# EAGLE board rgbsaber_control_v1.6_panel (EAGLE 5.10)
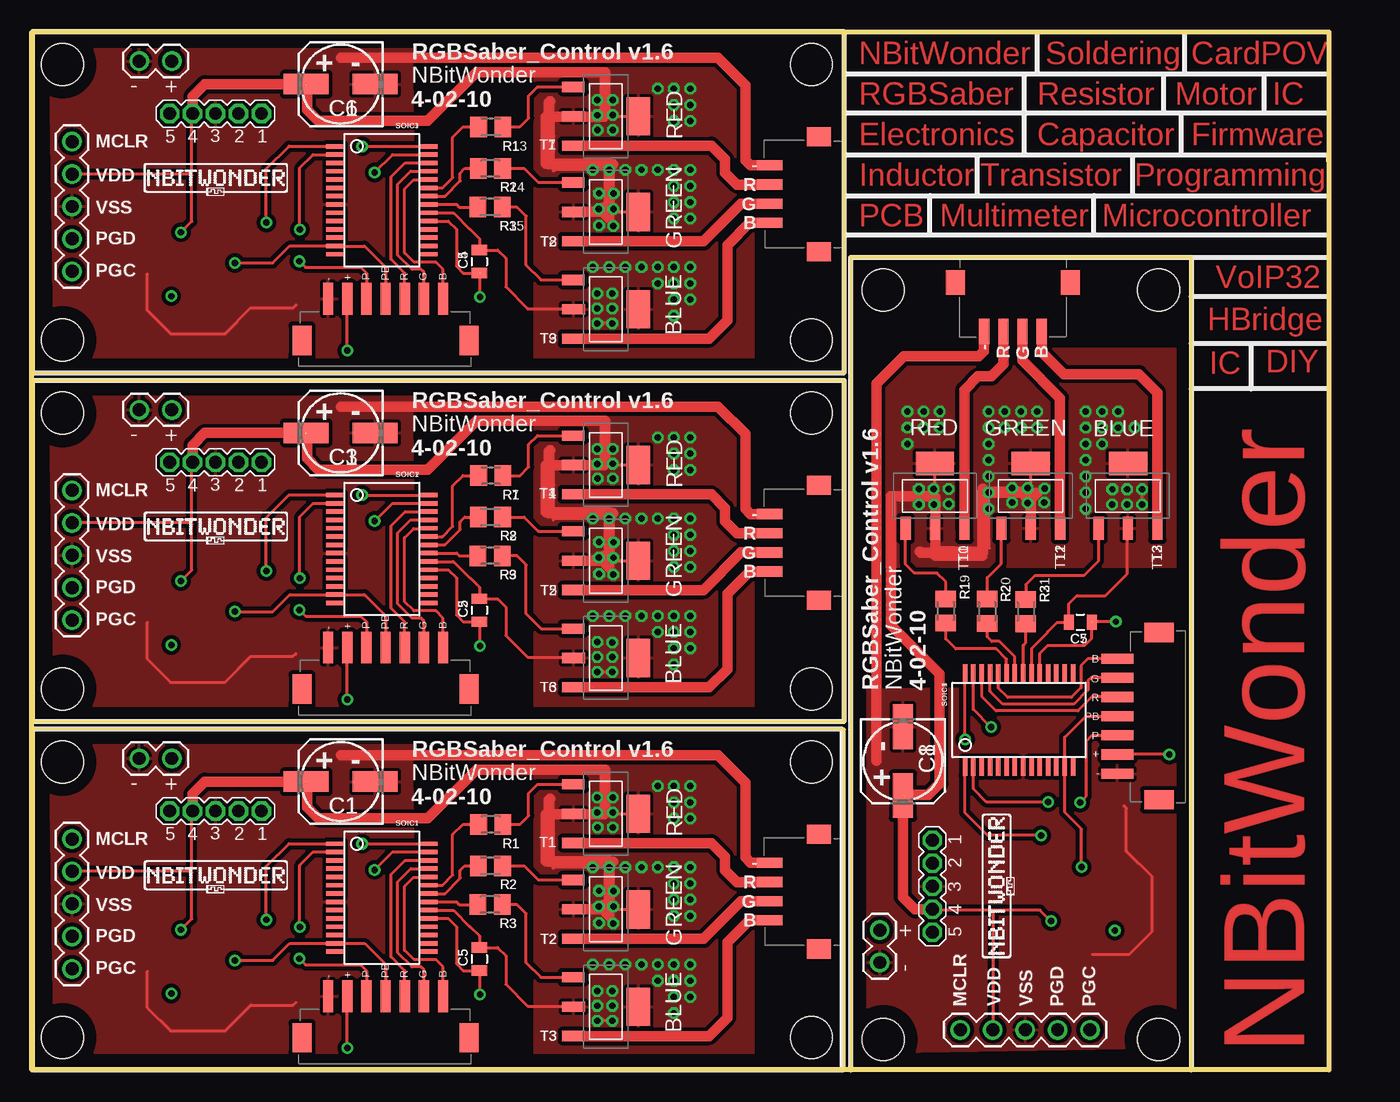
[diagram p0: board, top side]
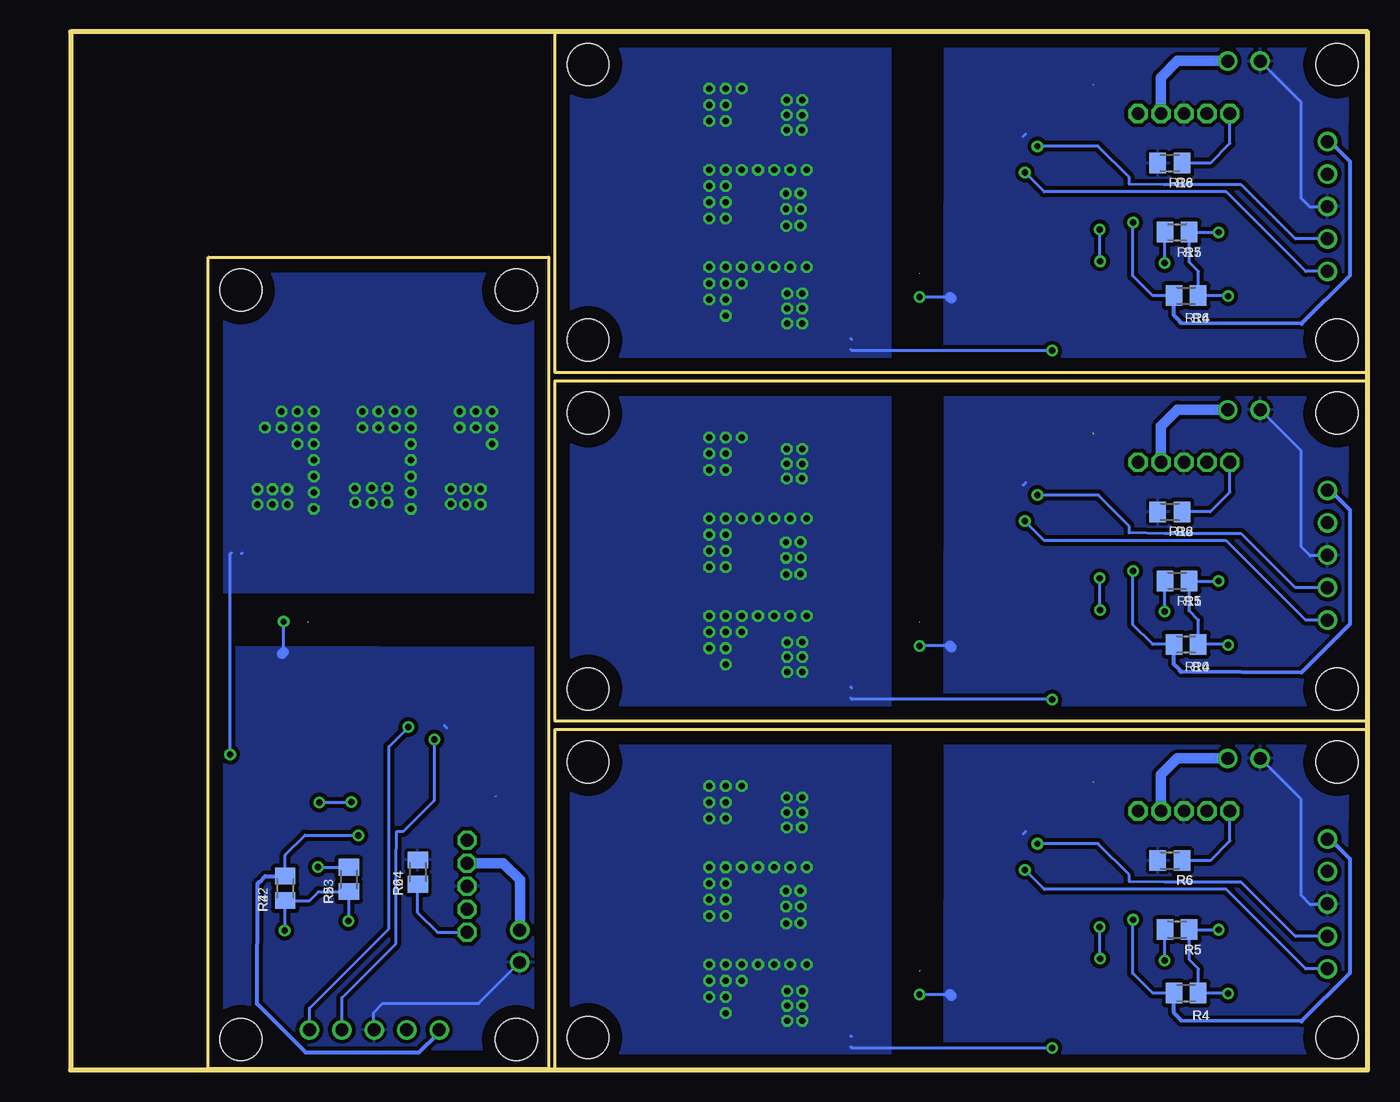
[diagram p1: board, bottom side, seen from below]

Size 101.6 x 81.28 mm. Coordinates in mm from the lower left corner, seen from the top.
Outline: 0,0 0,81.28 101.6,81.28 101.6,0 0,0
Outline: 0.1,0 63.65,0 63.65,26.66 0.1,26.67 0.1,0
Outline: 0.1,27.3 63.65,27.31 63.65,53.97 0.1,53.97 0.1,27.3
Outline: 0.1,54.61 63.65,54.61 63.65,81.27 0.1,81.28 0.1,54.61
Outline: 90.81,0.1 90.81,63.65 64.14,63.65 64.14,0.1 90.81,0.1
Copper layers (1*16): Top 0.035mm / dielectric 1.5mm / Bottom 0.035mm
Design rules "default": minimum track width 10mil, minimum drill 24mil, track to track 8mil, track to pad 8mil, pad to pad 8mil, via to via 8mil, smd to smd 8mil, copper to edge 40mil, drill to drill 8mil, minimum pad ring 10mil, minimum via ring 8mil, stop-mask expansion 4mil, vias tented up to drill 0mil, thermal gap 10mil

## Footprints (pad centres in the part's own frame; a part is rotated, then mirrored left to right if it is on the bottom)
JST_ZH_SM4_SE_4 = smd 0.8 x 2: 1 -2.25,-1.5; 2 -0.75,-1.5; 3 0.75,-1.5; 4 2.25,-1.5 | smd 1.5 x 1.9: NC0 -4.5,2.35; NC1 4.5,2.35
1X02 = drill 1.016 round: 1 0,0; 2 2.54,0
153CLV-0605 = smd 3.5 x 1.6: + 2.7,0; - -2.7,0
0805 = smd 0.8 x 1.2: 1 -0.9,0; 2 0.9,0
JST_ZH_SM4_TE_7 = smd 0.8 x 2.5: 1 -4.5,-3; 2 -3,-3; 3 -1.5,-3; 4 0,-3; 5 1.5,-3; 6 3,-3; 7 4.5,-3 | smd 1.5 x 2.3: NC0 -6.55,0.25; NC1 6.55,0.25
1X05 = drill 1.016 round: 1 0,0; 2 2.54,0; 3 5.08,0; 4 7.62,0; 5 10.16,0
M0805 = smd 1.3 x 1.6: 1 -0.95,0; 2 0.95,0
1X05_2MM = drill 1 octagon: 1 0,0; 2 1.8,0; 3 3.6,0; 4 5.4,0; 5 7.2,0
SSOP-28 = smd 0.348 x 1.397: 1 -4.225,-3.656; 2 -3.575,-3.656; 3 -2.925,-3.656; 4 -2.275,-3.656; 5 -1.625,-3.656; 6 -0.975,-3.656; 7 -0.325,-3.656; 8 0.325,-3.656; 9 0.975,-3.656; 10 1.625,-3.656; 11 2.275,-3.656; 12 2.925,-3.656; 13 3.575,-3.656; 14 4.225,-3.656; 15 4.225,3.656; 16 3.575,3.656; 17 2.925,3.656; 18 2.275,3.656; 19 1.625,3.656; 20 0.975,3.656; 21 0.325,3.656; 22 -0.325,3.656; 23 -0.975,3.656; 24 -1.625,3.656; 25 -2.275,3.656; 26 -2.925,3.656; 27 -3.575,3.656; 28 -4.225,3.656
SOT223 = smd 0.8 x 1.8: BASE -2.3,-2.55; COLL 0,-2.54; EMIT 2.3,-2.55 | smd 3 x 1.85: HEAT 0,2.54
STAND-OFF = hole 3.302: 0,0

## Placement (x,y rotation side)
_JST_SMD_RA1  1X04  [JST_ZH_SM4_SE_4]  59.31,13.97 270 top
_JST_SMD_RA2  1X04  [JST_ZH_SM4_SE_4]  59.31,41.28 270 top
_JST_SMD_RA3  1X04  [JST_ZH_SM4_SE_4]  59.31,68.58 270 top
_JST_SMD_RA4  1X04  [JST_ZH_SM4_SE_4]  76.83,59.31 0 top
BATT  [1X02]  8.41,24.39 0 top
BATT1  [1X02]  8.41,51.7 0 top
BATT2  [1X02]  8.41,79 0 top
BATT3  [1X02]  66.42,8.42 90 top
C1  [153CLV-0605]  24.18,22.58 180 top
C2  .01uF  [0805]  35.05,35.99 270 top
C3  [153CLV-0605]  24.18,49.89 180 top
C4  .01uF  [0805]  35.05,63.3 270 top
C5  .01uF  [0805]  35.05,8.69 270 top
C6  [153CLV-0605]  24.18,77.19 180 top
C7  .01uF  [0805]  82.12,35.05 0 top
C8  [153CLV-0605]  68.22,24.18 270 top
JST_SMD1  1X07_JST  [JST_ZH_SM4_TE_7]  27.7,2.77 180 top
JST_SMD2  1X07_JST  [JST_ZH_SM4_TE_7]  27.7,30.08 180 top
JST_SMD3  1X07_JST  [JST_ZH_SM4_TE_7]  27.7,57.38 180 top
JST_SMD4  1X07_JST  [JST_ZH_SM4_TE_7]  88.03,27.71 270 top
PRG  [1X05]  3.15,18.08 270 top
PRG1  [1X05]  3.15,45.39 270 top
PRG2  [1X05]  3.15,72.69 270 top
PRG3  [1X05]  72.72,3.15 0 top
R1  6.65K  [M0805]  35.94,19.23 0 top
R2  3.3K  [M0805]  35.91,15.98 0 top
R3  3.3K  [M0805]  35.89,12.96 0 top
R4  10K  [M0805]  14.22,6.02 180 bottom
R5  10K  [M0805]  14.92,11 180 bottom
R6  250  [M0805]  15.5,16.4 180 bottom
R7  6.65K  [M0805]  35.94,46.53 0 top
R8  3.3K  [M0805]  35.91,43.28 0 top
R9  3.3K  [M0805]  35.89,40.26 0 top
R10  10K  [M0805]  14.22,33.33 180 bottom
R11  10K  [M0805]  14.92,38.3 180 bottom
R12  250  [M0805]  15.5,43.7 180 bottom
R13  6.65K  [M0805]  35.94,73.84 0 top
R14  3.3K  [M0805]  35.91,70.59 0 top
R15  3.3K  [M0805]  35.89,67.56 0 top
R16  10K  [M0805]  14.22,60.63 180 bottom
R17  10K  [M0805]  14.92,65.61 180 bottom
R18  250  [M0805]  15.5,71.01 180 bottom
R19  6.65K  [M0805]  71.58,35.94 90 top
R20  3.3K  [M0805]  74.83,35.91 90 top
R21  3.3K  [M0805]  77.85,35.89 90 top
R22  10K  [M0805]  84.79,14.22 90 bottom
R23  10K  [M0805]  79.81,14.92 90 bottom
R24  250  [M0805]  74.41,15.5 90 bottom
REG  REG  [1X05_2MM]  10.78,20.28 0 top
REG1  REG  [1X05_2MM]  10.78,47.58 0 top
REG2  REG  [1X05_2MM]  10.78,74.89 0 top
REG3  REG  [1X05_2MM]  70.53,10.78 90 top
SOIC1  P18F2221SSOP  [SSOP-28]  27.41,13.49 270 top
SOIC2  P18F2221SSOP  [SSOP-28]  27.41,40.79 270 top
SOIC3  P18F2221SSOP  [SSOP-28]  27.41,68.1 270 top
SOIC4  P18F2221SSOP  [SSOP-28]  77.32,27.41 0 top
T1  FZTA14V1  [SOT223]  44.96,20.07 270 top
T2  FZTA14V1  [SOT223]  44.96,12.57 270 top
T3  FZTA14V1  [SOT223]  44.96,4.95 270 top
T4  FZTA14V1  [SOT223]  44.96,47.37 270 top
T5  FZTA14V1  [SOT223]  44.96,39.88 270 top
T6  FZTA14V1  [SOT223]  44.96,32.26 270 top
T7  FZTA14V1  [SOT223]  44.96,74.68 270 top
T8  FZTA14V1  [SOT223]  44.96,67.18 270 top
T9  FZTA14V1  [SOT223]  44.96,59.56 270 top
T10  FZTA14V1  [SOT223]  70.74,44.96 0 top
T11  FZTA14V1  [SOT223]  78.23,44.96 0 top
T12  FZTA14V1  [SOT223]  85.85,44.96 0 top
U$1  [STAND-OFF]  2.39,2.54 0 top
U$2  [STAND-OFF]  2.39,24.13 0 top
U$3  [STAND-OFF]  61.06,24.13 0 top
U$4  [STAND-OFF]  61.06,2.54 0 top
U$5  NBW_LOGOSMALL  [NBW_LOGO]  8.41,13.36 0 top
U$6  [STAND-OFF]  2.39,29.85 0 top
U$7  [STAND-OFF]  2.39,51.44 0 top
U$8  [STAND-OFF]  61.06,51.44 0 top
U$9  [STAND-OFF]  61.06,29.85 0 top
U$10  NBW_LOGOSMALL  [NBW_LOGO]  8.41,40.67 0 top
U$11  [STAND-OFF]  2.39,57.15 0 top
U$12  [STAND-OFF]  2.39,78.74 0 top
U$13  [STAND-OFF]  61.06,78.74 0 top
U$14  [STAND-OFF]  61.06,57.15 0 top
U$15  NBW_LOGOSMALL  [NBW_LOGO]  8.41,67.97 0 top
U$16  [STAND-OFF]  88.27,2.39 90 top
U$17  [STAND-OFF]  66.67,2.39 90 top
U$18  [STAND-OFF]  66.67,61.06 90 top
U$19  [STAND-OFF]  88.27,61.06 90 top
U$20  NBW_LOGOSMALL  [NBW_LOGO]  77.44,8.41 90 top

## Library data of the parts
_JST_SMD_RA1-_JST_SMD_RA4 JST_SMD1-JST_SMD4 REG REG1-REG3 U$5 U$10 U$15 U$20 = NBitWonder
BATT BATT1-BATT3 C2 C4 C5 C7 PRG PRG1-PRG3 U$1-U$4 U$6-U$9 U$11-U$14 U$16-U$19 = SparkFun
C1 C3 C6 C8 = rcl
R1-R24 = resistor
SOIC1-SOIC4 T1-T12 = purduecer

## Nets
BLUE_IND: JST_SMD1.1 SOIC1.24
BLUE_IND1: JST_SMD2.1 SOIC2.24
BLUE_IND2: JST_SMD3.1 SOIC3.24
BLUE_IND3: JST_SMD4.1 SOIC4.24
BLUE_LUX: _JST_SMD_RA1.4 T3.EMIT
BLUE_LUX1: _JST_SMD_RA2.4 T6.EMIT
BLUE_LUX2: _JST_SMD_RA3.4 T9.EMIT
BLUE_LUX3: _JST_SMD_RA4.4 T12.EMIT
GND: _JST_SMD_RA1.1 BATT.1 C1.- C5.2 JST_SMD1.7 PRG.3 R6.2 REG.3 SOIC1.8 SOIC1.19
GND1: _JST_SMD_RA2.1 BATT1.1 C2.2 C3.- JST_SMD2.7 PRG1.3 R12.2 REG1.3 SOIC2.8 SOIC2.19
GND2: _JST_SMD_RA3.1 BATT2.1 C4.2 C6.- JST_SMD3.7 PRG2.3 R18.2 REG2.3 SOIC3.8 SOIC3.19
GND3: _JST_SMD_RA4.1 BATT3.1 C7.2 C8.- JST_SMD4.7 PRG3.3 R24.2 REG3.3 SOIC4.8 SOIC4.19
GREEN_IND: JST_SMD1.2 SOIC1.25
GREEN_IND1: JST_SMD2.2 SOIC2.25
GREEN_IND2: JST_SMD3.2 SOIC3.25
GREEN_IND3: JST_SMD4.2 SOIC4.25
GREEN_LUX: _JST_SMD_RA1.3 T2.EMIT
GREEN_LUX1: _JST_SMD_RA2.3 T5.EMIT
GREEN_LUX2: _JST_SMD_RA3.3 T8.EMIT
GREEN_LUX3: _JST_SMD_RA4.3 T11.EMIT
MCLR: PRG.1 R4.2 SOIC1.1
MCLR1: PRG1.1 R10.2 SOIC2.1
MCLR2: PRG2.1 R16.2 SOIC3.1
MCLR3: PRG3.1 R22.2 SOIC4.1
N$1: R6.1 REG.1
N$2: R7.1 SOIC2.23
N$3: R7.2 T4.BASE
N$4: R1.1 SOIC1.23
N$5: R1.2 T1.BASE
N$6: R2.1 SOIC1.22
N$7: R2.2 T2.BASE
N$8: R3.1 SOIC1.21
N$9: R3.2 T3.BASE
N$10: R8.1 SOIC2.22
N$11: R8.2 T5.BASE
N$12: R9.1 SOIC2.21
N$13: R9.2 T6.BASE
N$14: R12.1 REG1.1
N$15: R13.1 SOIC3.23
N$16: R13.2 T7.BASE
N$17: R14.1 SOIC3.22
N$18: R14.2 T8.BASE
N$19: R15.1 SOIC3.21
N$20: R15.2 T9.BASE
N$21: R18.1 REG2.1
N$22: R19.1 SOIC4.23
N$23: R19.2 T10.BASE
N$24: R20.1 SOIC4.22
N$25: R20.2 T11.BASE
N$26: R21.1 SOIC4.21
N$27: R21.2 T12.BASE
N$28: R24.1 REG3.1
PB0: JST_SMD1.4 R5.2 SOIC1.13
PB1: JST_SMD2.4 R11.2 SOIC2.13
PB2: JST_SMD3.4 R17.2 SOIC3.13
PB3: JST_SMD4.4 R23.2 SOIC4.13
PGC: PRG.5 SOIC1.27
PGC1: PRG1.5 SOIC2.27
PGC2: PRG2.5 SOIC3.27
PGC3: PRG3.5 SOIC4.27
PGD: PRG.4 SOIC1.28
PGD1: PRG1.4 SOIC2.28
PGD2: PRG2.4 SOIC3.28
PGD3: PRG3.4 SOIC4.28
POT: JST_SMD1.5 SOIC1.2
POT1: JST_SMD2.5 SOIC2.2
POT2: JST_SMD3.5 SOIC3.2
POT3: JST_SMD4.5 SOIC4.2
PWR: BATT.2 REG.4
PWR1: BATT1.2 REG1.4
PWR2: BATT2.2 REG2.4
PWR3: BATT3.2 REG3.4
RED_IND: JST_SMD1.3 SOIC1.26
RED_IND1: JST_SMD2.3 SOIC2.26
RED_IND2: JST_SMD3.3 SOIC3.26
RED_IND3: JST_SMD4.3 SOIC4.26
RED_LUX: _JST_SMD_RA1.2 T1.EMIT
RED_LUX1: _JST_SMD_RA2.2 T4.EMIT
RED_LUX2: _JST_SMD_RA3.2 T7.EMIT
RED_LUX3: _JST_SMD_RA4.2 T10.EMIT
VCC: C1.+ C5.1 JST_SMD1.6 PRG.2 R4.1 R5.1 REG.2 SOIC1.20 T1.COLL T1.HEAT T2.COLL T2.HEAT T3.COLL T3.HEAT
VCC1: C2.1 C3.+ JST_SMD2.6 PRG1.2 R10.1 R11.1 REG1.2 SOIC2.20 T4.COLL T4.HEAT T5.COLL T5.HEAT T6.COLL T6.HEAT
VCC2: C4.1 C6.+ JST_SMD3.6 PRG2.2 R16.1 R17.1 REG2.2 SOIC3.20 T7.COLL T7.HEAT T8.COLL T8.HEAT T9.COLL T9.HEAT
VCC3: C7.1 C8.+ JST_SMD4.6 PRG3.2 R22.1 R23.1 REG3.2 SOIC4.20 T10.COLL T10.HEAT T11.COLL T11.HEAT T12.COLL T12.HEAT

## Tracks (layer width: path | path; a pad name or v marks a point on that pad's centre or on a via)
BLUE_IND
  Top 0.254: SOIC1.24 31.04,15.09 29.89,15.09 29.18,14.38 29.18,9.37 29.92,8.64 31.65,8.64 32.2,8.08 JST_SMD1.1 32.2,6.43 32.26,6.48 32.26,5.54 32.2,5.49 32.2,5.61 32.21,5.61 32.21,5.56 32.18,5.54
BLUE_IND1
  Top 0.254: SOIC2.24 31.04,42.39 29.89,42.39 29.18,41.68 29.18,36.68 29.92,35.94 31.65,35.94 32.2,35.38 JST_SMD2.1 32.2,33.73 32.26,33.78 32.26,32.84 32.2,32.79 32.2,32.92 32.21,32.92 32.21,32.87 32.18,32.84
BLUE_IND2
  Top 0.254: SOIC3.24 31.04,69.7 29.89,69.7 29.18,68.99 29.18,63.98 29.92,63.25 31.65,63.25 32.2,62.69 JST_SMD3.1 32.2,61.04 32.26,61.09 32.26,60.15 32.2,60.1 32.2,60.22 32.21,60.22 32.21,60.17 32.18,60.15
BLUE_IND3
  Top 0.254: SOIC4.24 75.72,31.04 75.72,29.89 76.43,29.18 81.43,29.18 82.17,29.92 82.17,31.65 82.73,32.2 JST_SMD4.1 84.38,32.2 84.33,32.26 85.27,32.26 85.32,32.2 85.19,32.2 85.19,32.21 85.24,32.21 85.27,32.18
BLUE_LUX
  Top 0.813: T3.EMIT 53.05,2.65 54.48,4.09 54.48,9.98 56.21,11.71 58.3,11.71 _JST_SMD_RA1.4
BLUE_LUX1
  Top 0.813: T6.EMIT 53.05,29.96 54.48,31.39 54.48,37.29 56.21,39.02 58.3,39.02 _JST_SMD_RA2.4
BLUE_LUX2
  Top 0.813: T9.EMIT 53.05,57.26 54.48,58.7 54.48,64.59 56.21,66.32 58.3,66.32 _JST_SMD_RA3.4
BLUE_LUX3
  Top 0.813: T12.EMIT 88.15,53.05 86.72,54.48 80.82,54.48 79.1,56.21 79.1,58.3 _JST_SMD_RA4.4
GND  (via drill 0.5)  (1 unrouted)
  Top 0.254: 23.2,4.95 JST_SMD1.7 | 20.68,5.29 20.46,5.07 17.14,5.07 15.12,3.05 10.87,3.05 9.04,4.88 9.04,7.72 | 34.89,7.69 35,7.69 35.1,7.79 v35.1,5.9 | C5.2 33.79,7.79 33.25,8.33 33.25,11.23 32.61,11.86 SOIC1.19 | v35.1,5.9
  Top 0.813: _JST_SMD_RA1.1 56.3,16.22 55.88,16.64 55.88,22.51 53.74,24.64 24.23,24.64
  Bottom 0.254: PRG.3 3.4,12.95 4.49,12.95 5.21,13.67 5.21,21.18 BATT.1 | 26.97,18.49 26.77,18.69 | v35.1,5.9 32.72,5.9 32.71,5.91
  Bottom 0.813: REG.3 | 32.71,5.91 32.6,5.8
  pour Bottom (isolate 0.305): 33.12,0.61 33.07,25.99 1.57,25.93 1.67,0.59
  pour Top (isolate 0.305): 30.12,0.61 29.74,25.86 1.4,25.81 1.8,0.69
GND1  (via drill 0.5)  (1 unrouted)
  Top 0.254: 23.2,32.25 JST_SMD2.7 | 20.68,32.6 20.46,32.38 17.14,32.38 15.12,30.36 10.87,30.36 9.04,32.18 9.04,35.03 | 34.89,35 35,35 35.1,35.1 v35.1,33.21 | 35.04,35.1 C2.2 33.79,35.09 33.25,35.64 33.25,38.53 32.61,39.17 SOIC2.19 | v35.1,33.21
  Top 0.813: _JST_SMD_RA2.1 56.3,43.53 55.88,43.94 55.88,49.81 53.74,51.94 24.23,51.94
  Bottom 0.254: PRG1.3 3.4,40.26 4.49,40.26 5.21,40.97 5.21,48.48 BATT1.1 | 26.97,45.8 26.77,46 | v35.1,33.21 32.72,33.21 32.71,33.22
  Bottom 0.813: REG1.3 | 32.71,33.22 32.6,33.11
  pour Bottom (isolate 0.305): 33.12,27.92 33.07,53.29 1.57,53.24 1.67,27.89
  pour Top (isolate 0.305): 30.12,27.92 29.74,53.16 1.4,53.11 1.8,27.99
GND2  (via drill 0.5)  (1 unrouted)
  Top 0.254: 23.2,59.56 JST_SMD3.7 | 20.68,59.9 20.46,59.68 17.14,59.68 15.12,57.66 10.87,57.66 9.04,59.49 9.04,62.33 | 34.89,62.3 35,62.3 35.1,62.4 v35.1,60.51 | C4.2 33.79,62.4 33.25,62.94 33.25,65.84 32.61,66.47 SOIC3.19 | v35.1,60.51
  Top 0.813: _JST_SMD_RA3.1 56.3,70.83 55.88,71.25 55.88,77.12 53.74,79.25 24.23,79.25
  Bottom 0.254: PRG2.3 3.4,67.56 4.49,67.56 5.21,68.28 5.21,75.79 BATT2.1 | 26.97,73.1 26.77,73.3 | v35.1,60.51 32.72,60.51 32.71,60.52
  Bottom 0.813: REG2.3 | 32.71,60.52 32.6,60.41
  pour Bottom (isolate 0.305): 33.12,55.22 33.07,80.6 1.57,80.54 1.67,55.2
  pour Top (isolate 0.305): 30.12,55.22 29.74,80.47 1.4,80.42 1.8,55.3
GND3  (via drill 0.5)  (1 unrouted)
  Top 0.254: 85.86,23.21 JST_SMD4.7 | 85.51,20.68 85.73,20.46 85.73,17.14 87.75,15.12 87.75,10.87 85.93,9.04 83.08,9.04 | 83.11,34.89 83.11,35 83.01,35.1 v84.91,35.1 | 83.01,35.04 C7.2 83.02,33.79 82.47,33.25 79.58,33.25 78.94,32.61 SOIC4.19 | v84.91,35.1
  Top 0.813: _JST_SMD_RA4.1 74.58,56.3 74.17,55.88 68.3,55.88 66.17,53.75 66.17,24.23
  Bottom 0.254: PRG3.3 77.86,3.41 77.86,4.49 77.14,5.21 69.63,5.21 BATT3.1 | 72.31,26.97 72.11,26.77 | v84.91,35.1 84.91,32.72 84.89,32.71
  Bottom 0.813: REG3.3 | 84.89,32.71 85,32.6
  pour Bottom (isolate 0.305): 90.2,33.12 64.82,33.07 64.87,1.57 90.22,1.68
  pour Top (isolate 0.305): 90.2,30.12 64.95,29.74 65,1.4 90.12,1.8
GREEN_IND
  Top 0.254: 30.7,5.41 JST_SMD1.2 30.7,7.88 30.5,8.08 29.77,8.08 28.65,9.2 28.65,14.75 29.66,15.76 SOIC1.25 | SOIC1.25
GREEN_IND1
  Top 0.254: 30.7,32.72 JST_SMD2.2 30.7,35.18 30.5,35.38 29.77,35.38 28.65,36.5 28.65,42.05 29.66,43.07 SOIC2.25
GREEN_IND2
  Top 0.254: 30.7,60.02 JST_SMD3.2 30.7,62.49 30.5,62.69 29.77,62.69 28.65,63.81 28.65,69.36 29.66,70.37 SOIC3.25
GREEN_IND3
  Top 0.254: 85.39,30.71 JST_SMD4.2 82.93,30.71 82.73,30.51 82.73,29.77 81.61,28.65 76.06,28.65 75.04,29.67 SOIC4.25 | SOIC4.25
GREEN_LUX
  Top 0.813: T2.EMIT 52.61,10.27 55.56,13.22 _JST_SMD_RA1.3
GREEN_LUX1
  Top 0.813: T5.EMIT 52.61,37.58 55.56,40.53 _JST_SMD_RA2.3
GREEN_LUX2
  Top 0.813: T8.EMIT 52.61,64.88 55.56,67.83 _JST_SMD_RA3.3
GREEN_LUX3
  Top 0.813: T11.EMIT 80.53,52.61 77.58,55.56 _JST_SMD_RA4.3
MCLR  (via drill 0.5)
  Top 0.254: v18.36,11.76 18.36,15.95 20.14,17.73 23.73,17.73 SOIC1.1
  Bottom 0.254: R4.2 16.84,6.02 18.39,7.57 18.39,11.74 v18.36,11.76
  Bottom 0.305: PRG.1 2.89,18.04 1.37,16.51 1.37,7.62 5.18,3.81 14.6,3.86 14.72,3.98 14.72,4.02 15.17,4.47 R4.2
MCLR1  (via drill 0.5)
  Top 0.254: v18.36,39.07 18.36,43.26 20.14,45.03 23.73,45.03 SOIC2.1
  Bottom 0.254: R10.2 16.84,33.33 18.39,34.88 18.39,39.04 v18.36,39.07
  Bottom 0.305: PRG1.1 2.89,45.34 1.37,43.82 1.37,34.93 5.18,31.12 14.6,31.17 14.72,31.28 14.72,31.32 15.17,31.78 R10.2
MCLR2  (via drill 0.5)
  Top 0.254: v18.36,66.37 18.36,70.56 20.14,72.34 23.73,72.34 SOIC3.1
  Bottom 0.254: R16.2 16.84,60.63 18.39,62.18 18.39,66.35 v18.36,66.37
  Bottom 0.305: PRG2.1 2.89,72.65 1.37,71.12 1.37,62.23 5.18,58.42 14.6,58.47 14.72,58.59 14.72,58.63 15.17,59.08 R16.2
MCLR3  (via drill 0.5)
  Top 0.254: v79.05,18.36 74.85,18.36 73.08,20.14 73.08,23.73 SOIC4.1
  Bottom 0.254: R22.2 84.78,16.84 83.24,18.39 79.07,18.39 v79.05,18.36
  Bottom 0.305: PRG3.1 72.77,2.9 74.3,1.37 83.19,1.37 87,5.18 86.94,14.6 86.83,14.72 86.79,14.72 86.34,15.17 R22.2
N$1
  Bottom 0.254: R6.1 12.32,16.4 10.78,17.94 REG.1
N$2
  Top 0.254: R7.1 33.76,46.53 32.97,45.75 32.97,42.57 32.16,41.77 SOIC2.23
N$3
  Top 0.254: R7.2 38.23,46.53 38.91,47.22 38.91,48.99 39.59,49.67 T4.BASE
N$4
  Top 0.254: R1.1 33.76,19.23 32.97,18.44 32.97,15.27 32.16,14.46 SOIC1.23
N$5
  Top 0.254: R1.2 38.23,19.23 38.91,19.92 38.91,21.69 39.59,22.37 T1.BASE
N$6
  Top 0.254: SOIC1.22 32.35,13.81 33.55,15.01 33.55,15.62 33.91,15.98 R2.1
N$7
  Top 0.254: 42.39,14.86 T2.BASE 42.4,14.88 39.65,14.88 38.56,15.98 R2.2
N$8
  Top 0.254: SOIC1.21 33.27,13.16 33.48,12.96 R3.1
N$9
  Top 0.254: T3.BASE 39.87,7.25 38.71,8.41 38.71,12.24 38,12.95 R3.2
N$10
  Top 0.254: SOIC2.22 32.35,41.12 33.55,42.32 33.55,42.93 33.91,43.28 R8.1
N$11
  Top 0.254: 42.39,42.16 T5.BASE 42.4,42.19 39.65,42.19 38.56,43.28 R8.2
N$12
  Top 0.254: SOIC2.21 33.27,40.47 33.48,40.26 R9.1
N$13
  Top 0.254: T6.BASE 39.87,34.55 38.71,35.72 38.71,39.55 38,40.26 R9.2
N$14
  Bottom 0.254: R12.1 12.32,43.7 10.78,45.25 REG1.1
N$15
  Top 0.254: R13.1 33.76,73.84 32.97,73.05 32.97,69.88 32.16,69.07 SOIC3.23
N$16
  Top 0.254: R13.2 38.23,73.84 38.91,74.53 38.91,76.3 39.59,76.98 T7.BASE
N$17
  Top 0.254: SOIC3.22 32.35,68.42 33.55,69.62 33.55,70.23 33.91,70.59 R14.1
N$18
  Top 0.254: 42.39,69.47 T8.BASE 42.4,69.5 39.65,69.5 38.56,70.59 R14.2
N$19
  Top 0.254: SOIC3.21 33.27,67.77 33.48,67.56 R15.1
N$20
  Top 0.254: T9.BASE 39.87,61.86 38.71,63.02 38.71,66.85 38,67.56 R15.2
N$21
  Bottom 0.254: R18.1 12.32,71.01 10.78,72.55 REG2.1
N$22
  Top 0.254: R19.1 71.58,33.76 72.36,32.97 75.54,32.97 76.34,32.16 SOIC4.23
N$23
  Top 0.254: R19.2 71.58,38.23 70.89,38.91 69.12,38.91 68.44,39.59 T10.BASE
N$24
  Top 0.254: SOIC4.22 76.99,32.35 75.79,33.55 75.18,33.55 74.83,33.91 R20.1
N$25
  Top 0.254: 75.95,42.39 T11.BASE 75.92,42.4 75.92,39.65 74.83,38.56 R20.2
N$26
  Top 0.254: SOIC4.21 77.64,33.27 77.85,33.48 R21.1
N$27
  Top 0.254: T12.BASE 83.56,39.88 82.39,38.71 78.56,38.71 77.86,38 R21.2
N$28
  Bottom 0.254: R24.1 74.41,12.32 72.86,10.78 REG3.1
PB0  (via drill 0.5)
  Top 0.254: v15.9,8.59 18.87,8.59 20.2,9.91 SOIC1.13 26.06,9.91 27.7,8.26 JST_SMD1.4
  Bottom 0.254: R5.2 15.87,8.61 v15.9,8.59
PB1  (via drill 0.5)
  Top 0.254: v15.9,35.89 18.87,35.89 20.2,37.22 SOIC2.13 26.06,37.21 27.7,35.57 JST_SMD2.4
  Bottom 0.254: R11.2 15.87,35.92 v15.9,35.89
PB2  (via drill 0.5)
  Top 0.254: v15.9,63.2 18.87,63.2 20.2,64.52 SOIC3.13 26.06,64.52 27.7,62.87 JST_SMD3.4
  Bottom 0.254: R17.2 15.87,63.22 v15.9,63.2
PB3  (via drill 0.5)
  Top 0.254: v82.22,15.9 82.22,18.87 80.89,20.2 SOIC4.13 80.9,26.06 82.55,27.71 JST_SMD4.4
  Bottom 0.254: R23.2 82.19,15.87 v82.22,15.9
PGC  (via drill 0.5)
  Top 0.254: v26.85,15.67 28.24,17.07 SOIC1.27
  Bottom 0.254: PRG.5 4.85,7.93 11.07,14.15 25.32,14.15 v26.85,15.67
PGC1  (via drill 0.5)
  Top 0.254: v26.85,42.98 28.24,44.38 SOIC2.27
  Bottom 0.254: PRG1.5 4.85,35.23 11.07,41.45 25.32,41.45 v26.85,42.98
PGC2  (via drill 0.5)
  Top 0.254: v26.85,70.28 28.24,71.68 SOIC3.27
  Bottom 0.254: PRG2.5 4.85,62.54 11.07,68.76 25.32,68.76 v26.85,70.28
PGC3  (via drill 0.5)
  Top 0.254: v75.13,26.85 73.74,28.24 SOIC4.27
  Bottom 0.254: PRG3.5 82.88,4.85 76.66,11.07 76.66,25.32 v75.13,26.85
PGD  (via drill 0.5)
  Top 0.254: v25.87,17.72 SOIC1.28
  Bottom 0.254: PRG.4 5.66,10.47 9.9,14.7 15.9,14.7 18.68,14.75 18.68,15.28 21.08,17.68 21.08,17.71 21.09,17.72 v25.87,17.72
PGD1  (via drill 0.5)
  Top 0.254: v25.87,45.02 SOIC2.28
  Bottom 0.254: PRG1.4 5.66,37.77 9.9,42.01 15.9,42.01 18.68,42.06 18.68,42.58 21.08,44.98 21.08,45.01 21.09,45.02 v25.87,45.02
PGD2  (via drill 0.5)
  Top 0.254: v25.87,72.33 SOIC3.28
  Bottom 0.254: PRG2.4 5.66,65.08 9.9,69.31 15.9,69.31 18.68,69.36 18.68,69.89 21.08,72.29 21.08,72.32 21.09,72.33 v25.87,72.33
PGD3  (via drill 0.5)
  Top 0.254: v73.09,25.87 SOIC4.28
  Bottom 0.254: PRG3.4 80.34,5.66 76.11,9.9 76.11,15.9 76.05,18.68 75.53,18.68 73.13,21.08 73.1,21.08 73.09,21.09 v73.09,25.87
POT  (via drill 0.5)
  Top 0.254: v20.98,11.2 20.98,16.03 22.02,17.07 SOIC1.2 | JST_SMD1.5 26.2,7.78 25.75,8.23 21.44,8.23 v20.95,8.71
  Bottom 0.254: v20.98,11.2 20.95,11.18 v20.95,8.71
POT1  (via drill 0.5)
  Top 0.254: v20.98,38.51 20.98,43.33 22.02,44.38 SOIC2.2 | JST_SMD2.5 26.2,35.09 25.75,35.54 21.44,35.54 v20.95,36.02
  Bottom 0.254: v20.98,38.51 20.95,38.48 v20.95,36.02
POT2  (via drill 0.5)
  Top 0.254: v20.98,65.81 20.98,70.64 22.02,71.68 SOIC3.2 | JST_SMD3.5 26.2,62.39 25.75,62.84 21.44,62.84 v20.95,63.32
  Bottom 0.254: v20.98,65.81 20.95,65.79 v20.95,63.32
POT3  (via drill 0.5)
  Top 0.254: v79.6,20.98 74.78,20.98 73.74,22.02 SOIC4.2 | JST_SMD4.5 83.03,26.21 82.58,25.76 82.58,21.44 v82.09,20.95
  Bottom 0.254: v79.6,20.98 79.63,20.95 v82.09,20.95
PWR
  Top 0.813: REG.4
  Bottom 0.813: REG.4 16.2,20.3 16.2,23.1 14.9,24.4 10.97,24.4 BATT.2
PWR1
  Top 0.813: REG1.4
  Bottom 0.813: REG1.4 16.2,47.6 16.2,50.4 14.9,51.71 10.97,51.71 BATT1.2
PWR2
  Top 0.813: REG2.4
  Bottom 0.813: REG2.4 16.2,74.91 16.2,77.71 14.9,79.01 10.97,79.01 BATT2.2
PWR3
  Top 0.813: REG3.4
  Bottom 0.813: REG3.4 70.51,16.21 67.71,16.21 66.41,14.9 66.41,10.97 BATT3.2
RED_IND
  Top 0.254: SOIC1.26 29.23,16.41 28.1,15.28 28.12,15.26 28.12,8.87 29.2,7.78 JST_SMD1.3
RED_IND1
  Top 0.254: SOIC2.26 29.23,43.71 28.1,42.58 28.12,42.56 28.12,36.17 29.2,35.08 JST_SMD2.3
RED_IND2
  Top 0.254: SOIC3.26 29.23,71.02 28.1,69.89 28.12,69.87 28.12,63.48 29.2,62.39 JST_SMD3.3
RED_IND3
  Top 0.254: SOIC4.26 74.4,29.24 75.53,28.1 75.55,28.12 81.94,28.12 83.03,29.21 JST_SMD4.3
RED_LUX
  Top 0.813: T1.EMIT 53.23,17.77 54.3,16.69 54.3,15.65 55.24,14.71 58.29,14.71 _JST_SMD_RA1.2
RED_LUX1
  Top 0.813: T4.EMIT 53.23,45.07 54.3,43.99 54.3,42.95 55.24,42.01 58.29,42.01 _JST_SMD_RA2.2
RED_LUX2
  Top 0.813: T7.EMIT 53.23,72.38 54.3,71.3 54.3,70.26 55.24,69.32 58.29,69.32 _JST_SMD_RA3.2
RED_LUX3
  Top 0.813: T10.EMIT 73.04,53.23 74.12,54.3 75.16,54.3 76.1,55.24 76.1,58.29 _JST_SMD_RA4.2
VCC  (via drill 0.5)  (1 unrouted)
  Top 0.254: 44.97,12.57 T2.COLL 43.18,12.57 | 44.97,12.57 T2.HEAT | T1.HEAT T1.COLL 40.87,20.06 40.87,18.51 40.85,18.51 40.85,15.78 40.95,15.88 v43.94,15.88 v45.21,15.88 v45.56,14.01 v45.55,12.8 44.97,12.57 | T3.COLL 42.4,4.97 | v45.47,3.85 v44.28,3.85 | v10.91,5.98 11.09,5.8 | T3.COLL 42.4,4.97 | v24.7,1.71 v24.7,1.72 JST_SMD1.6 24.7,4.58 24.7,5.31 | 12.52,15.46 12.52,20.21 REG.2 | PRG.2 12.43,15.54 12.52,15.46 | 12.52,15.46 12.52,11.84 v11.66,10.98 | T3.COLL 42.37,5 38.84,5 37.13,6.71 37.13,8.94 36.49,9.59 C5.1 35.05,10.49 34.31,11.23 34.29,11.23 33.02,12.5 31.08,12.5 SOIC1.20
  Top 0.813: 40.59,21.24 40.51,21.16 40.51,16.31 45.51,16.31 45.21,16 v45.21,15.88 45.21,12.07 44.7,12.57 T2.COLL 44.83,12.57 44.83,12.96 45.26,12.96 45.26,16.36 40.28,16.36 40.28,20.04 44.83,20.04 44.83,20.27 44.91,20.27 44.91,23.52 34.82,23.52 31.01,19.71 22.43,19.71 21.56,20.58 21.56,22.35 21.44,22.48 | REG.2 12.58,21.63 13.54,22.58 C1.+
  Bottom 0.254: 13.23,6.02 R4.1 | v10.91,5.98 10.96,6.02 13.23,6.02 | 40.42,2.61 40.49,2.68 | 13.23,6.02 13.26,6 13.26,7.93 13.97,8.64 R5.1 13.96,10.98 v11.66,10.98 | v24.7,1.71 40.39,1.71 40.49,1.8
  other vias: 44.28,21.33 45.5,21.33 45.5,20.16 44.31,19 45.5,19 49.02,22.23 50.29,22.23 51.56,22.23 50.29,20.96 51.56,20.96 51.56,19.69 50.29,19.69 46.48,15.88 44.42,14.04 44.4,12.81 44.42,11.52 45.54,11.48 47.75,15.88 49.02,15.88 50.29,15.88 51.56,15.88 50.29,14.61 51.56,14.61 50.29,13.34 51.56,13.34 50.29,12.07 51.56,12.07 51.56,8.26 51.56,6.99 51.56,5.72 50.29,4.45 50.29,5.72 50.29,6.99 50.29,8.26 49.02,8.26 49.02,6.99 47.75,8.26 46.48,8.26 45.21,8.26 43.94,8.26 44.28,6.19 45.47,6.18 45.47,5.03 44.28,5.03 45.5,20.16 44.28,20.15
  pour Top (isolate 0.305): 39.42,0.86 39.42,25.68 56.46,25.68 56.46,0.76 39.39,0.76 39.39,0.99
  pour Bottom (isolate 0.305): 37.9,0.69 62.69,0.74 62.69,25.86 37.41,25.93 37.41,0.69
VCC1  (via drill 0.5)  (1 unrouted)
  Top 0.254: 44.97,39.88 T5.COLL 43.18,39.88 | 44.97,39.88 T5.HEAT | T4.HEAT T4.COLL 40.87,47.37 40.87,45.81 40.85,45.81 40.85,43.08 40.95,43.18 v43.94,43.18 v45.21,43.18 v45.56,41.32 v45.55,40.1 44.97,39.88 | T6.COLL 42.4,32.27 | v45.47,31.16 v44.28,31.16 | v10.91,33.28 11.09,33.11 | T6.COLL 42.4,32.27 | v24.7,29.02 JST_SMD2.6 24.7,31.88 24.7,32.62 | 12.52,42.76 12.52,47.52 REG1.2 | PRG1.2 12.43,42.85 12.52,42.76 | 12.52,42.76 12.52,39.14 v11.66,38.29 | T6.COLL 42.37,32.31 38.84,32.31 37.13,34.01 37.13,36.25 36.49,36.89 C2.1 35.05,37.8 34.31,38.53 34.29,38.53 33.02,39.8 31.08,39.8 SOIC2.20
  Top 0.813: 40.59,48.54 40.51,48.46 40.51,43.61 45.51,43.61 45.21,43.31 v45.21,43.18 45.21,39.37 44.7,39.88 T5.COLL 44.83,39.88 44.83,40.26 45.26,40.26 45.26,43.66 40.28,43.66 40.28,47.35 44.83,47.35 44.83,47.57 44.91,47.57 44.91,50.83 34.82,50.83 31.01,47.02 22.43,47.02 21.56,47.88 21.56,49.66 21.44,49.78 | REG1.2 12.58,48.93 13.54,49.89 C3.+
  Bottom 0.254: 13.23,33.33 R10.1 | v10.91,33.28 10.96,33.33 13.23,33.33 | 40.42,29.91 40.49,29.98 | 13.23,33.33 13.26,33.3 13.26,35.23 13.97,35.94 R11.1 13.96,38.29 v11.66,38.29 | v24.7,29.02 40.39,29.02 40.49,29.11
  other vias: 44.28,48.63 45.5,48.63 45.5,47.47 44.31,46.3 45.5,46.3 49.02,49.53 50.29,49.53 51.56,49.53 50.29,48.26 51.56,48.26 51.56,46.99 50.29,46.99 46.48,43.18 44.42,41.34 44.4,40.11 44.42,38.82 45.54,38.78 47.75,43.18 49.02,43.18 50.29,43.18 51.56,43.18 50.29,41.91 51.56,41.91 50.29,40.64 51.56,40.64 50.29,39.37 51.56,39.37 51.56,35.56 51.56,34.29 51.56,33.02 50.29,31.75 50.29,33.02 50.29,34.29 50.29,35.56 49.02,35.56 49.02,34.29 47.75,35.56 46.48,35.56 45.21,35.56 43.94,35.56 44.28,33.5 45.47,33.48 45.47,32.33 44.28,32.33 45.5,47.47 44.28,47.45
  pour Top (isolate 0.305): 39.42,28.17 39.42,52.99 56.46,52.99 56.46,28.07 39.39,28.07 39.39,28.3
  pour Bottom (isolate 0.305): 37.9,27.99 62.69,28.04 62.69,53.16 37.41,53.24 37.41,27.99
VCC2  (via drill 0.5)  (1 unrouted)
  Top 0.254: 44.97,67.18 T8.COLL 43.18,67.18 | 44.97,67.18 T8.HEAT | T7.HEAT T7.COLL 40.87,74.67 40.87,73.12 40.85,73.12 40.85,70.39 40.95,70.49 v43.94,70.49 v45.21,70.49 v45.56,68.62 v45.55,67.41 44.97,67.18 | T9.COLL 42.4,59.58 | v45.47,58.46 v44.28,58.46 | v10.91,60.59 11.09,60.41 | T9.COLL 42.4,59.58 | v24.7,56.32 v24.7,56.33 JST_SMD3.6 24.7,59.19 24.7,59.92 | 12.52,70.06 12.52,74.83 REG2.2 | PRG2.2 12.43,70.15 12.52,70.06 | 12.52,70.06 12.52,66.45 v11.66,65.59 | T9.COLL 42.37,59.61 38.84,59.61 37.13,61.32 37.13,63.55 36.49,64.2 C4.1 35.05,65.1 34.31,65.84 34.29,65.84 33.02,67.11 31.08,67.11 SOIC3.20
  Top 0.813: 40.59,75.84 40.51,75.77 40.51,70.92 45.51,70.92 45.21,70.61 v45.21,70.49 45.21,66.68 44.7,67.18 T8.COLL 44.83,67.18 44.83,67.56 45.26,67.56 45.26,70.97 40.28,70.97 40.28,74.65 44.83,74.65 44.83,74.88 44.91,74.88 44.91,78.13 34.82,78.13 31.01,74.32 22.43,74.32 21.56,75.19 21.56,76.96 21.44,77.09 | REG2.2 12.58,76.24 13.54,77.19 C6.+
  Bottom 0.254: 13.23,60.63 R16.1 | v10.91,60.59 10.96,60.63 13.23,60.63 | 40.42,57.22 40.49,57.29 | 13.23,60.63 13.26,60.6 13.26,62.54 13.97,63.25 R17.1 13.96,65.59 v11.66,65.59 | v24.7,56.32 40.39,56.32 40.49,56.41
  other vias: 44.28,75.94 45.5,75.94 45.5,74.77 44.31,73.61 45.5,73.61 49.02,76.84 50.29,76.84 51.56,76.84 50.29,75.57 51.56,75.57 51.56,74.3 50.29,74.3 46.48,70.49 44.42,68.65 44.4,67.42 44.42,66.13 45.54,66.09 47.75,70.49 49.02,70.49 50.29,70.49 51.56,70.49 50.29,69.22 51.56,69.22 50.29,67.95 51.56,67.95 50.29,66.68 51.56,66.68 51.56,62.87 51.56,61.6 51.56,60.33 50.29,59.06 50.29,60.33 50.29,61.6 50.29,62.87 49.02,62.87 49.02,61.6 47.75,62.87 46.48,62.87 45.21,62.87 43.94,62.87 44.28,60.8 45.47,60.79 45.47,59.64 44.28,59.64 45.5,74.77 44.28,74.76
  pour Top (isolate 0.305): 39.42,55.47 39.42,80.29 56.46,80.29 56.46,55.37 39.39,55.37 39.39,55.6
  pour Bottom (isolate 0.305): 37.9,55.3 62.69,55.35 62.69,80.47 37.41,80.54 37.41,55.3
VCC3  (via drill 0.5)  (1 unrouted)
  Top 0.254: 78.23,44.97 T11.COLL 78.23,43.18 | 78.23,44.97 T11.HEAT | T10.HEAT T10.COLL 70.74,40.87 72.3,40.87 72.3,40.86 75.03,40.86 74.93,40.95 v74.93,43.94 v74.93,45.21 v76.79,45.56 v78.01,45.55 78.23,44.97 | T12.COLL 85.84,42.4 | v86.96,45.47 v86.95,44.28 | v84.83,10.91 85,11.09 | T12.COLL 85.84,42.41 | v89.09,24.7 v89.09,24.71 JST_SMD4.6 86.23,24.71 85.49,24.71 | 75.35,12.52 70.59,12.52 REG3.2 | PRG3.2 75.26,12.43 75.35,12.52 | 75.35,12.52 78.97,12.52 v79.83,11.66 | T12.COLL 85.8,42.37 85.8,38.84 84.1,37.13 81.86,37.13 81.22,36.49 C7.1 80.31,35.05 79.58,34.31 79.58,34.29 78.31,33.02 78.31,31.08 SOIC4.20
  Top 0.813: 69.57,40.59 69.65,40.51 74.5,40.51 74.5,45.52 74.81,45.21 v74.93,45.21 78.74,45.21 78.23,44.7 T11.COLL 78.23,44.83 77.85,44.83 77.85,45.26 74.45,45.26 74.45,40.28 70.76,40.28 70.76,44.83 70.54,44.83 70.54,44.91 67.28,44.91 67.28,34.82 71.09,31.01 71.09,22.43 70.23,21.56 68.45,21.56 68.33,21.44 | REG3.2 69.18,12.58 68.22,13.54 C8.+
  Bottom 0.254: 84.78,13.23 R22.1 | v84.83,10.91 84.78,10.96 84.78,13.23 | 88.2,40.42 88.13,40.49 | 84.78,13.23 84.81,13.26 82.88,13.26 82.17,13.97 R23.1 79.83,13.96 v79.83,11.66 | v89.09,24.7 89.09,40.39 89,40.49
  other vias: 69.48,44.28 69.48,45.5 70.64,45.5 71.81,44.31 71.81,45.5 68.58,49.02 68.58,50.29 68.58,51.56 69.85,50.29 69.85,51.56 71.12,51.56 71.12,50.29 74.93,46.48 76.77,44.42 78,44.4 79.29,44.42 79.33,45.54 74.93,47.75 74.93,49.02 74.93,50.29 74.93,51.56 76.2,50.29 76.2,51.56 77.47,50.29 77.47,51.56 78.74,50.29 78.74,51.56 82.55,51.56 83.82,51.56 85.09,51.56 86.36,50.29 85.09,50.29 83.82,50.29 82.55,50.29 82.55,49.02 83.82,49.02 82.55,47.75 82.55,46.48 82.55,45.21 82.55,43.94 84.61,44.28 84.63,45.47 85.78,45.47 85.78,44.28 70.64,45.5 70.66,44.28
  pour Top (isolate 0.305): 89.94,39.42 65.13,39.42 65.13,56.46 90.04,56.46 90.04,39.39 89.81,39.39
  pour Bottom (isolate 0.305): 90.12,37.9 90.07,62.69 64.95,62.69 64.87,37.41 90.12,37.41

## Text on the board
Top: NBitWonder | Soldering | CardPOV | RGBSaber | Resistor | Motor | IC | Electronics | Capacitor | Firmware | Inductor | Transistor | Programming | PCB | Multimeter | Microcontroller | VoIP32 | HBridge | DIY | IC | NBitWonder
tPlace: RGBSaber_Control v1.6 | + | - | NBitWonder | - | + | 4-02-10 | 5 | 4 | 3 | 2 | 1 | RED | MCLR | - | VDD | R | G | VSS | B | PGD | GREEN | PGC | - | + | P | PB | R | G | B | BLUE | - | R | G | B | RGBSaber_Control v1.6 | + | - | RED | GREEN | BLUE | NBitWonder | - | + | 4-02-10 | RED | MCLR | 5 | 4 | 3 | 2 | 1 | - | VDD | R | G | VSS | B | PGD | GREEN | PGC | + | P | R | G | B | - | PB | B | G | BLUE | RGBSaber_Control v1.6 | NBitWonder | 4-02-10 | R | PB | P | - | + | RGBSaber_Control v1.6 | - | + | - | NBitWonder | - | + | + | 4-02-10 | MCLR | 5 | 4 | 3 | 2 | 1 | RED | 1 | - | 2 | VDD | R | G | 3 | VSS | B | 4 | PGD | GREEN | + | 5 | - | PGC | - | + | P | PB | R | G | B | MCLR | VDD | VSS | PGD | PGC | BLUE
_tNames: C1 | C1 | SOIC1 | SOIC1 | T1 | T1 | R1 | R1 | R2 | R2 | R3 | R3 | T2 | T2 | C5 | C5 | T3 | T3 | C1 | C1 | SOIC1 | SOIC1 | T1 | T1 | R1 | R1 | R2 | R2 | T1 | T1 | T2 | T2 | T3 | T3 | R3 | R3 | T2 | T2 | C5 | C5 | R1 | R1 | R2 | R2 | R3 | R3 | C5 | C5 | T3 | T3 | SOIC1 | SOIC1 | C1 | C1 | C1 | C1 | SOIC1 | SOIC1 | T1 | T1 | R1 | R1 | R2 | R2 | R3 | R3 | T2 | T2 | C5 | C5 | T3 | T3
_bNames: R6 | R6 | R5 | R5 | R4 | R4 | R6 | R6 | R5 | R5 | R4 | R4 | R6 | R6 | R6 | R6 | R5 | R5 | R4 | R4 | R5 | R5 | R4 | R4